# EAGLE board MainPower (EAGLE 9.6.2)
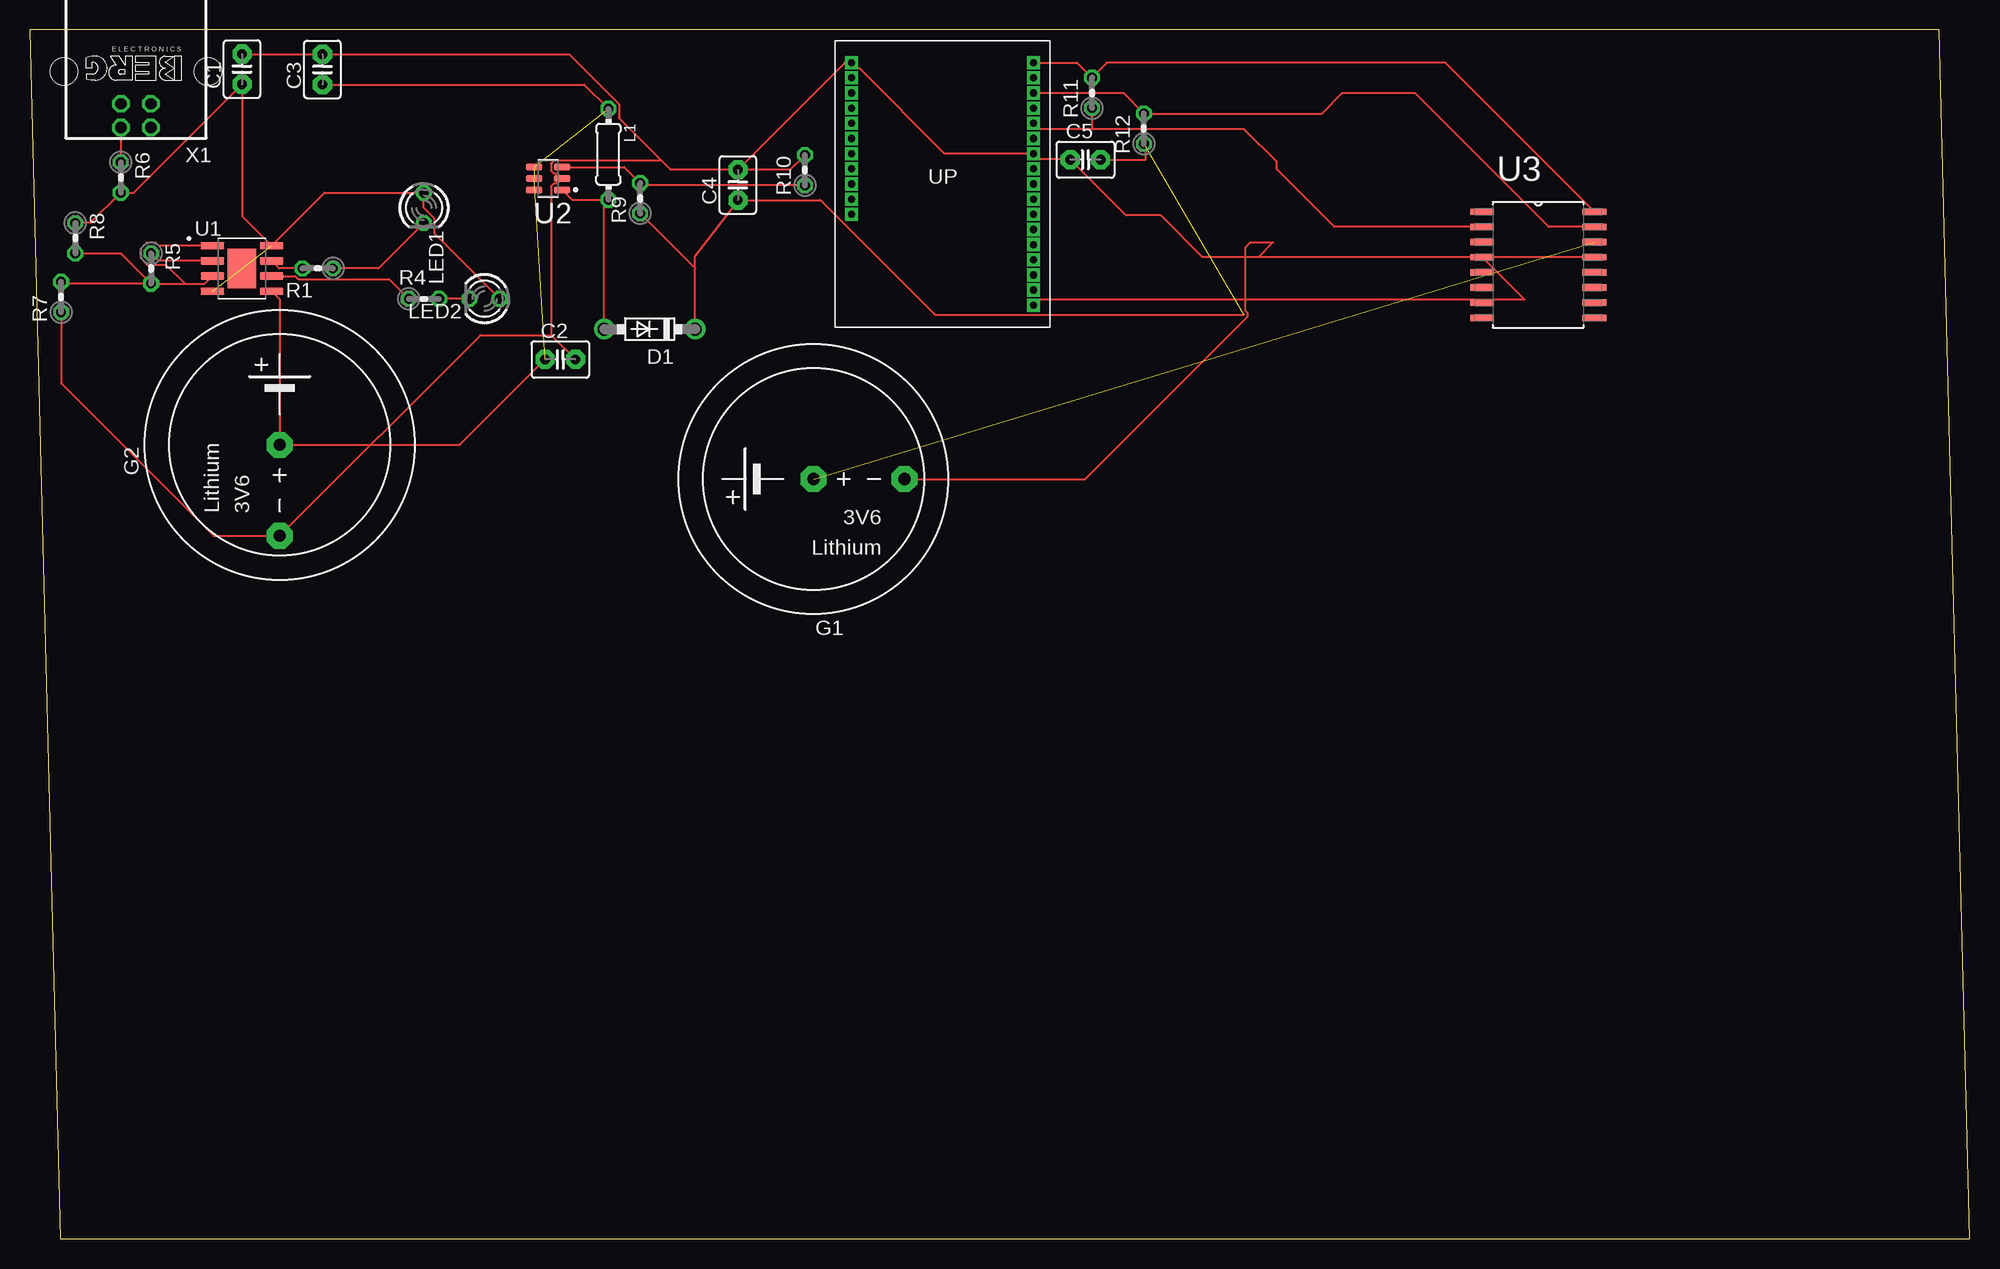
[diagram p0: board, top side]

Size 162.54 x 101.27 mm. Coordinates in mm from the lower left corner, seen from the top.
Outline: 2.54,0 162.54,0 160,101.27 0,101.27 2.54,0
Copper layers (1*16): Top 0.035mm / dielectric 1.5mm / Bottom 0.035mm
Design rules "default": minimum track width 6mil, minimum drill 0.35mm, track to track 6mil, track to pad 6mil, pad to pad 6mil, via to via 6mil, smd to smd 6mil, copper to edge 40mil, drill to drill 6mil, minimum pad ring 10mil, minimum via ring 8mil, stop-mask expansion 4mil, vias tented up to drill 0mil, thermal gap 10mil

## Footprints (pad centres in the part's own frame; a part is rotated, then mirrored left to right if it is on the bottom)
C2.5-3 = drill 0.813 pad 1.6 octagon: 1 -1.27,0; 2 1.27,0
DO41-7.6 = drill 1.1 pad 1.7: A 3.81,0; C -3.81,0
SL-340/P3.6V = drill 1.016 pad 2.159 octagon: + 0,0; - -7.62,0
0204/7 = drill 0.813 octagon: 1 -3.81,0; 2 3.81,0
LED3MM = drill 0.813 octagon: A -1.27,0; K 1.27,0
0204V = drill 0.813 octagon: 1 -1.27,0; 2 1.27,0
SOP127P600X175-9N = smd 1.97 x 0.6: 1 -2.475,1.905; 2 -2.475,0.635; 3 -2.475,-0.635; 4 -2.475,-1.905; 5 2.475,-1.905; 6 2.475,-0.635; 7 2.475,0.635; 8 2.475,1.905 | smd 2.413 x 3.302: 9 0,0
SOT95P280X145-6N = smd 1.37 x 0.59: 1 -1.17,0.95; 2 -1.17,0; 3 -1.17,-0.95; 4 1.17,-0.95; 5 1.17,0; 6 1.17,0.95
SOIC127P1032X265-16N = smd 1.981 x 0.533: 1 -4.699,4.445; 2 -4.699,3.175; 3 -4.699,1.905; 4 -4.699,0.635; 5 -4.699,-0.635; 6 -4.699,-1.905; 7 -4.699,-3.175; 8 -4.699,-4.445; 9 4.699,-4.445; 10 4.699,-3.175; 11 4.699,-1.905; 12 4.699,-0.635; 13 4.699,0.635; 14 4.699,1.905; 15 4.699,3.175; 16 4.699,4.445
STAMPS3_PIN_FTP = drill 0.6 square: 1 -3.81,7.62; 2 -3.81,6.35; 3 -3.81,5.08; 4 -3.81,3.81; 5 -3.81,2.54; 6 -3.81,1.27; 7 -3.81,0; 8 -3.81,-1.27; 9 -3.81,-2.54; 10 -3.81,-3.81; 11 -3.81,-5.08; 12 -3.81,-6.35; 13 -3.81,-7.62; 14 -3.81,-8.89; 15 -3.81,-10.16; 16 -3.81,-11.43; 17 -3.81,-12.7; 18 11.43,-12.7; 19 11.43,-11.43; 20 11.43,-10.16; 21 11.43,-8.89; 22 11.43,-7.62; 23 11.43,-6.35; 24 11.43,-5.08; 25 11.43,-3.81; 26 11.43,-2.54; 27 11.43,-1.27; 28 11.43,0
PN61729 = drill 0.95 octagon: 1 1.25,4.71; 2 -1.25,4.71; 3 -1.25,2.71; 4 1.25,2.71 | hole 2.3: -6.02,0; 6.02,0

## Placement (x,y rotation side)
C1  10uF  [C2.5-3]  17.78,97.98 90 top
C2  10uF  [C2.5-3]  44.45,73.66 0 top
C3  10uF  [C2.5-3]  24.52,97.95 90 top
C4  10uF  [C2.5-3]  59.33,88.28 90 top
C5  10uF  [C2.5-3]  88.45,90.39 0 top
D1  1N5819-B  [DO41-7.6]  51.94,76.2 180 top
G1  SL-340/P3.6V  [SL-340/P3.6V]  65.66,63.64 180 top
G2  SL-340/P3.6V  [SL-340/P3.6V]  20.94,66.5 90 top
L1  [0204/7]  48.48,90.85 270 top
LED1  TLLR4400  [LED3MM]  33.02,86.36 270 top
LED2  TLLG4400  [LED3MM]  38.1,78.74 180 top
R1  1k  [0204V]  24.13,81.28 180 top
R4  1k  [0204V]  33.02,78.74 0 top
R5  1k  [0204V]  10.16,81.28 270 top
R6  1k  [0204V]  7.62,88.9 270 top
R7  1k  [0204V]  2.62,78.89 90 top
R8  1k  [0204V]  3.81,83.82 270 top
R9  1k  [0204V]  51.14,87.16 90 top
R10  1k  [0204V]  64.95,89.51 90 top
R11  10k  [0204V]  89,95.99 90 top
R12  10k  [0204V]  93.35,92.99 90 top
U1  TP4056  [SOP127P600X175-9N]  17.78,81.28 0 top
U2  MT3608  [SOT95P280X145-6N]  43.42,88.82 180 top
U3  DS3231S  [SOIC127P1032X265-16N]  126.39,81.59 0 top
U$2  STAMP-S3M-PIN  [STAMPS3_PIN_FTP]  80.29,85.82 180 top
X1  [PN61729]  8.89,97.79 180 top

## Library data of the parts
C1-C5 = capacitor-wima
D1 = diode
G1 G2 = battery
L1 = rcl; SPICEPREFIX: L
LED1 = led; MF: VISHAY SEMICONDUCTOR; OC_FARNELL: 1612437
LED2 = led; MF: VISHAY SEMICONDUCTOR; OC_FARNELL: 1612435
R1 R4-R12 = rcl; SPICEPREFIX: R
U1 = TP4056; AVAILABILITY: Not in stock; CHECK_PRICES: https://www.snapeda.com/parts/TP4056/NanJing+Top+Power+ASIC+Corp./view-part/?ref=eda; DESCRIPTION: Complete single cell Li-Ion battery with a constant current / constant voltage linear charger; MF: NanJing Top Power ASIC Corp.; MP: TP4056; PACKAGE: Package; PRICE: None; SNAPEDA_LINK: https://www.snapeda.com/parts/TP4056/NanJing+Top+Power+ASIC+Corp./view-part/?ref=snap
U2 = MT3608; AVAILABILITY: Not in stock; CHECK_PRICES: https://www.snapeda.com/parts/MT3608/Aerosemi+Technology+Co.%252C+Ltd/view-part/?ref=eda; DESCRIPTION: High Efficiency 1.2MHz 2A Step Up Converter; MF: Aerosemi Technology Co., Ltd; MP: MT3608; PACKAGE: Package; PRICE: None; SNAPEDA_LINK: https://www.snapeda.com/parts/MT3608/Aerosemi+Technology+Co.%252C+Ltd/view-part/?ref=snap
U3 = DS3231S; AVAILABILITY: In Stock; CHECK_PRICES: https://www.snapeda.com/parts/DS3231S%23/Analog+Devices/view-part/?ref=eda; DESCRIPTION: Extremely Accurate I²C-Integrated RTC/TCXO/Crystal; MF: Analog Devices; MP: DS3231S#; PACKAGE: SOIC-16 Maxim; PRICE: None; SNAPEDA_LINK: https://www.snapeda.com/parts/DS3231S%23/Analog+Devices/view-part/?ref=snap
U$2 = StampS3
X1 = con-berg; OC_FARNELL: unknown; OC_NEWARK: unknown

## Nets
3V3: U$2.28
5V: C4.1 C5.2 D1.C R9.1 R11.1 R12.1 U3.2 U$2.13
CLK_RST: U3.4 U$2.1
GND: C1.2 C2.2 C3.2 C4.2 C5.1 G1.- G2.- R5.2 R7.1 R7.2 R8.2 R10.2 U1.1 U1.3 U2.2 U3.13 U$2.11 U$2.18
N$2: D1.A L1.2 U2.1
N$3: R4.1 U1.6
N$4: G1.+ U3.14
N$5: R5.1 U1.2
N$8: LED2.K R4.2
N$9: LED1.K R1.1
N$10: R1.2 U1.7
N$11: C2.1 C3.1 G2.+ L1.1 U1.5 U2.4 U2.5
N$12: R9.2 R10.1 U2.3
SCL: R11.2 U3.16 U$2.17
SDA: R12.2 U3.15 U$2.15
USB: C1.1 LED1.A LED2.A R6.1 R6.2 R8.1 U1.4 U1.8 X1.1

## Tracks (layer width: path | path; a pad name or v marks a point on that pad's centre or on a via)
5V  (1 unrouted)
  Top 0.152: C5.2 93.5,90.39 93.5,91.57 R12.1 93.35,92.95 | R11.1 89,92.95 | R9.1 55.75,81.28 D1.C 55.75,82.36 C4.1 66.24,87.01 75.83,77.42 101.75,77.42 | 93.35,92.95 101.75,92.95 104.48,90.22 104.48,89.59 109.3,84.77 U3.2 | 93.35,92.95 89,92.95 | 89,92.95 84.59,92.95 U$2.13
CLK_RST
  Top 0.152: U$2.1 84.59,78.69 125.23,78.69 U3.4
GND  (1 unrouted)
  Top 0.152: C4.2 68.3,98.52 U$2.18 69.35,98.03 69.51,98.03 76.64,90.9 U$2.11 84.59,90.41 87.18,90.41 C5.1 91.85,85.72 94.78,85.72 98.27,82.22 U3.13 102.94,82.22 104.17,83.46 102.28,83.46 101.87,83.05 101.87,77.73 102.05,77.54 102.05,77.29 88.4,63.64 G1.- | U2.2 44.16,89.25 43.9,89.25 43.68,89.47 43.68,90.07 43.9,90.29 52.95,90.29 | C1.2 17.81,99.22 C3.2 45.18,99.22 49.37,95.03 49.37,93.88 52.95,90.29 | 44.32,88.82 U2.2 | U2.2 44.16,88.39 43.9,88.39 43.68,88.17 43.68,75.7 | 43.68,75.7 C2.2 45.66,73.6 | R8.2 7.62,82.55 R5.2 | R5.2 2.77,80.01 R7.2 | R7.1 2.62,71.65 15.39,58.88 G2.- 37.76,75.7 43.68,75.7 | R5.2 13,80.01 | 13,80.01 14.67,80.01 U1.3 | 13,80.01 11.4,81.61 9.84,81.61 9.27,82.18 9.27,82.92 9.79,83.44 10.53,83.44 10.78,83.19 U1.1 | R10.2 63.72,89.55 C4.2 | C4.2 53.7,89.55 52.95,90.29
N$2
  Top 0.152: 44.69,87.77 U2.1 45.42,87.04 L1.2 48.13,86.69 D1.A
N$3
  Top 0.152: U1.6 22.24,80.64 22.49,80.39 30.1,80.39 R4.1
N$4  (1 unrouted)
  Top 0.152: G1.+ 65.31,64
N$5
  Top 0.152: U1.2 10.79,81.91 R5.1
N$8
  Top 0.152: LED2.K R4.2
N$9
  Top 0.152: LED1.K 29.21,81.28 R1.1
N$10
  Top 0.152: R1.2 20.89,81.28 U1.7
N$11  (3 unrouted)
  Top 0.152: C3.1 46.46,96.68 L1.1 | U1.5 20.94,78.69 G2.+ 36.02,66.5 C2.1
N$12
  Top 0.152: R10.1 51.33,88.24 R9.2 49.8,89.77 U2.3
SCL
  Top 0.152: U3.16 118.6,98.52 90.25,98.52 R11.2 | U$2.17 87.74,98.52 R11.2 | R11.2
SDA
  Top 0.152: U3.15 127.28,84.77 116.06,95.98 110,95.98 108.28,94.26 R12.2 91.63,95.98 U$2.15
USB  (2 unrouted)
  Top 0.152: X1.1 7.62,93.06 R6.1 | R8.1 5.08,85.09 R6.2 8.7,87.63 C1.1 17.78,85.66 U1.8 24.7,87.63 33,87.63 | 33,87.63 LED1.A | LED2.A 33.91,84.2 33.91,85.46 33,86.37 33,87.63